# EAGLE board USB-UART-Board-CP2102N v33 (EAGLE 9.7.0)
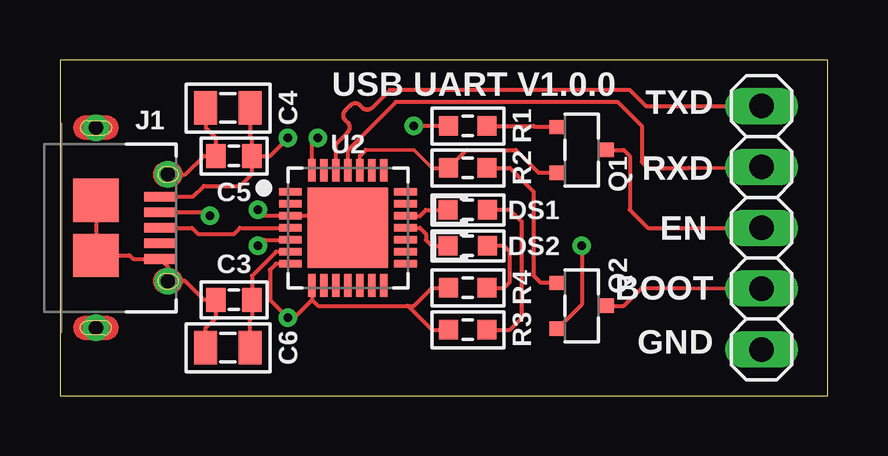
[diagram p0: board, top side]
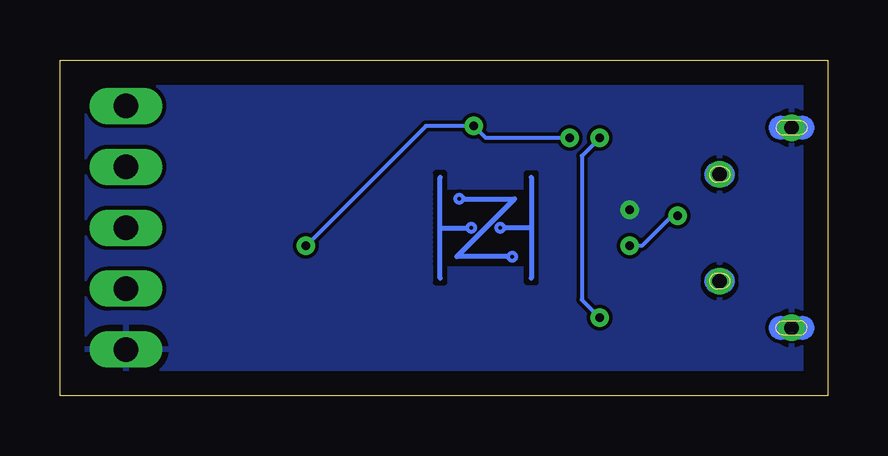
[diagram p1: board, bottom side, seen from below]

Size 32 x 14 mm. Coordinates in mm from the lower left corner, seen from the top.
Outline: 0,0 32,0 32,14 0,14 0,0
Copper layers (1*16): Top 0.035mm / dielectric 1.5mm / Bottom 0.035mm
Design rules "default": minimum track width 6mil, minimum drill 0.35mm, track to track 6mil, track to pad 6mil, pad to pad 6mil, via to via 6mil, smd to smd 6mil, copper to edge 40mil, drill to drill 6mil, minimum pad ring 10mil, minimum via ring 8mil, stop-mask expansion 4mil, vias tented up to drill 0mil, thermal gap 10mil

## Footprints (pad centres in the part's own frame; a part is rotated, then mirrored left to right if it is on the bottom)
1608-SEM = smd 0.8 x 1: 1 -0.75,0; 2 0.75,0
2012-SEM = smd 0.95 x 1.4: 1 -0.925,0; 2 0.925,0
1608 = smd 0.8 x 0.8: 1 -0.825,0; 2 0.825,0
47589-0001 = smd 0.4 x 1.35: 1 -1.3,2.675; 2 -0.65,2.675; 3 0,2.675; 4 0.65,2.675; 5 1.3,2.675 | drill 0.6 pad 0.9: SHIELD@1 -2.225,3; SHIELD@2 2.225,3; SHIELD@3 -4.175,0; SHIELD@6 4.175,0 | smd 1.8 x 1.9: SHIELD@4 -1.15,0; SHIELD@5 1.15,0
1X05 = drill 1.016 long: 1 -5.08,0; 2 -2.54,0; 3 0,0; 4 2.54,0; 5 5.08,0
SOT-23 = smd 0.6 x 0.7: 1 0.95,1; 2 -0.95,1; 3 0,-1
1608-SEM' = smd 0.8 x 0.8: 1 -0.8,0; 2 0.8,0
QFN28 = smd 0.95 x 0.3: 1 -2.4,1.5; 2 -2.4,1; 3 -2.4,0.5; 4 -2.4,0; 5 -2.4,-0.5; 6 -2.4,-1; 7 -2.4,-1.5; 15 2.4,-1.5; 16 2.4,-1; 17 2.4,-0.5; 18 2.4,0; 19 2.4,0.5; 20 2.4,1; 21 2.4,1.5 | smd 0.3 x 0.95: 8 -1.5,-2.4; 9 -1,-2.4; 10 -0.5,-2.4; 11 0,-2.4; 12 0.5,-2.4; 13 1,-2.4; 14 1.5,-2.4; 22 1.5,2.4; 23 1,2.4; 24 0.5,2.4; 25 0,2.4; 26 -0.5,2.4; 27 -1,2.4; 28 -1.5,2.4 | smd 3.35 x 3.35: PAD 0,0

## Placement (x,y rotation side)
C3  0.1µF ± 5%  [1608-SEM]  7.25,4 180 top
C4  4.7µF ± 10%  [2012-SEM]  7,12 180 top
C5  0.1µF ± 5%  [1608-SEM]  7.25,10 180 top
C6  4.7µF ± 10%  [2012-SEM]  7,2 180 top
DS1  Green  [1608]  17,7.75 0 top
DS2  Green  [1608]  17,6.25 0 top
J1  MICRO-USB-AB  [47589-0001]  1.5,7 270 top
JP1  [1X05]  29.25,7 270 top
Q1  BC817  [SOT-23]  21.75,10.25 90 top
Q2  BC817  [SOT-23]  21.75,3.75 90 top
R1  10kΩ ± 1%  [1608-SEM']  17,11.25 0 top
R2  10kΩ ± 1%  [1608-SEM']  17,9.5 0 top
R3  10kΩ ± 1%  [1608-SEM']  17,2.75 0 top
R4  10kΩ ± 1%  [1608-SEM']  17,4.5 0 top
U2  CP2102N-QFN28  [QFN28]  12,7 0 top
U$2  SIGNATURE  [SIGNATURE]  14.25,7 0 bottom

## Library data of the parts
C3 C5 = Harrington-Capacitors; SIZE: 1608; TEMPERATURE: X7R; VOLTAGE: 50V
C4 C6 = Harrington-Capacitors; SIZE: 2012; TEMPERATURE: X7R; VOLTAGE: 25V
DS1 DS2 = Harrington-Diodes; SIZE: 1608; TEMPERATURE: -40~100°C; VOLTAGE: 3.3~4.1V
J1 = Harrington-Connectors
JP1 = pinhead
Q1 Q2 = Harrington-Transistors; IC_MAX: 500mA; POWER: 250mW; VCE_MAX: 45V
R1-R4 = Harrington-Resistors; POWER: 1/10W; TEMPERATURE: -55~155°C; VOLTAGE: 31.6V
U2 = Harrington-ICs
U$2 = Harrington-Aesthetics

## Nets
CP2102N_D+: J1.3 U2.4
CP2102N_D-: J1.2 U2.5
CP2102N_DTR: Q2.2 R1.1 U2.28
CP2102N_RTS: Q1.2 R2.1 U2.24
CP2102N_RXD: JP1.2 U2.25
CP2102N_RXT: DS2.1 U2.18
CP2102N_TXD: JP1.1 U2.26
CP2102N_TXT: DS1.1 U2.19
CP2102N_VBUS: C4.1 C5.1 J1.1 R3.1 R4.1 U2.7 U2.8
CP2102N_VDD: C3.1 C6.1 U2.6
EN: JP1.3 Q1.3
GND: C3.2 C4.2 C5.2 C6.2 J1.5 J1.SHIELD@1 J1.SHIELD@2 J1.SHIELD@3 J1.SHIELD@4 J1.SHIELD@5 J1.SHIELD@6 JP1.5 U2.3 U2.PAD
IO0/BOOT: JP1.4 Q2.3
N$3: Q1.1 R1.2
N$4: Q2.1 R2.2
N$5: DS1.2 R3.2
N$6: DS2.2 R4.2

## Tracks (layer width: path | path; a pad name or v marks a point on that pad's centre or on a via)
CP2102N_D+
  Top 0.16: J1.3 5.5,7 5.75,6.75 7.25,6.75 7.5,7 U2.4
CP2102N_D-  (via drill 0.35)
  Top 0.16: J1.2 6.1,7.65 v6.25,7.5 | v8.25,6.25 8.5,6.5 U2.5
  Bottom 0.16: v6.25,7.5 6.5,7.5 7.75,6.25 v8.25,6.25
CP2102N_DTR  (via drill 0.35)
  Top 0.16: U2.28 10.5,10.5 v10.75,10.75 | v21.75,6.25 21.75,3.8 Q2.2 | R1.1 v14.75,11.25
  Bottom 0.16: v10.75,10.75 14.25,10.75 v14.75,11.25 16.75,11.25 v21.75,6.25
CP2102N_RTS
  Top 0.152: 12.75,10.25 14.75,10.25 15.5,9.5
  Top 0.16: U2.24 12.5,10 12.75,10.25 | 15.5,9.5 R2.1 16.95,10.25 19,10.25 19.95,9.3 Q1.2
CP2102N_RXD
  Top 0.16: U2.25 12,10.25 14,12.25 23.25,12.25 24.25,11.25 24.25,9.75 24.5,9.5 26.21,9.5 JP1.2
CP2102N_RXT
  Top 0.16: U2.18 15,7 15.25,6.75 15.25,6.5 15.5,6.25 DS2.1
CP2102N_TXD
  Top 0.16: U2.26 11.5,10.5 12,11 arc90 12,11.38 11.89,11.5 arc-90 11.89,11.88 12.12,12.11 arc-90 12.5,12.11 12.62,12 arc90 13,12 13.75,12.75 23.75,12.75 24.42,12.08 JP1.1
CP2102N_TXT
  Top 0.16: U2.19 15,7.5 15.25,7.75 DS1.1
CP2102N_VBUS  (via drill 0.35)
  Top 0.16: J1.1 5.55,8.3 6,8.75 7.5,8.75 8,9.25 C5.1 | C5.1 8,10.75 7.92,10.82 C4.1 | C5.1 8.75,10 v9.5,10.75 | U2.7 9,5.5 8.75,5.25 8.75,4 v9.5,3.25 9.75,3.25 10.5,4 | U2.8 10.5,4 | 10.5,4 10.75,3.75 14.5,3.75 | 14.5,3.75 15.5,2.75 R3.1 | 14.5,3.75 14.75,3.75 15.5,4.5 R4.1
  Bottom 0.16: v9.5,10.75 10.25,10 10.25,4 v9.5,3.25
CP2102N_VDD
  Top 0.16: U2.6 9,6 8,5 C3.1 8,3.25 7.92,3.17 C6.1
EN
  Top 0.16: Q1.3 23.5,10.25 23.75,10 23.75,7.75 24.5,7 JP1.3
GND  (via drill 0.35)
  Top 0.16: C4.2 6.08,11.18 6.5,10.75 C5.2 6,10 5.22,9.22 J1.SHIELD@1 | C6.2 6.08,2.83 6.5,3.25 C3.2 6,4 5.22,4.78 J1.SHIELD@2 4.5,5.38 J1.5 3.05,5.7 2.9,5.85 J1.SHIELD@5 J1.SHIELD@4 | U2.PAD 11.5,7.5 U2.3 8.5,7.5 v8.25,7.75
  pour Bottom: -0.92,-0.92 32.92,-0.92 32.92,14.92 -0.92,14.92
IO0/BOOT
  Top 0.16: Q2.3 23.5,3.75 24.25,4.5 26.21,4.5 JP1.4
N$3
  Top 0.16: R1.2 19.75,11.25 19.8,11.2 Q1.1
N$4
  Top 0.16: R2.2 18.75,9.5 19.75,8.5 19.75,5 20.05,4.7 Q2.1
N$5
  Top 0.16: R3.2 18.75,2.75 19.25,3.25 19.25,7.25 18.75,7.75 DS1.2
N$6
  Top 0.16: R4.2 18.5,4.5 18.75,4.75 18.75,6 18.5,6.25 DS2.2

## Text on the board
tPlace: USB UART V1.0.0 | TXD | RXD | EN | BOOT | GND